# Altium PCB PCB.PcbDoc
Units mm, origin at the board's own origin, x right, y up, seen from the top; angles counter-clockwise.
Board outline 97 x 50 mm, 2 copper layers (Top Layer, Bottom Layer); 43 components, 30 nets, 128 pads, 38 vias.
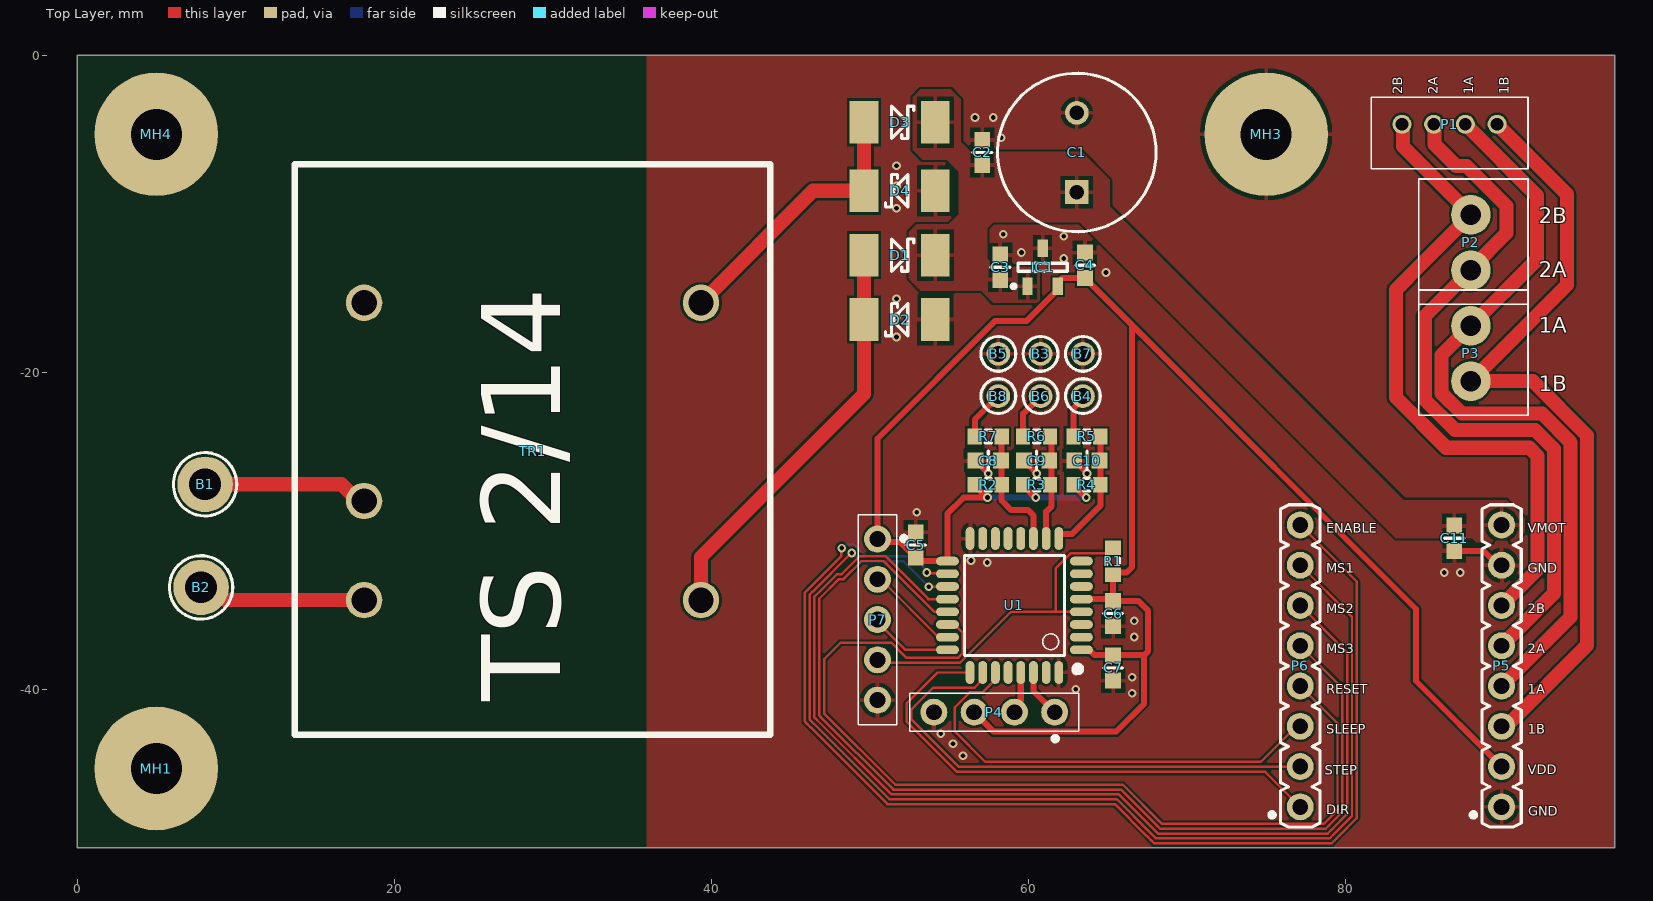
[diagram p0: Top Layer view]
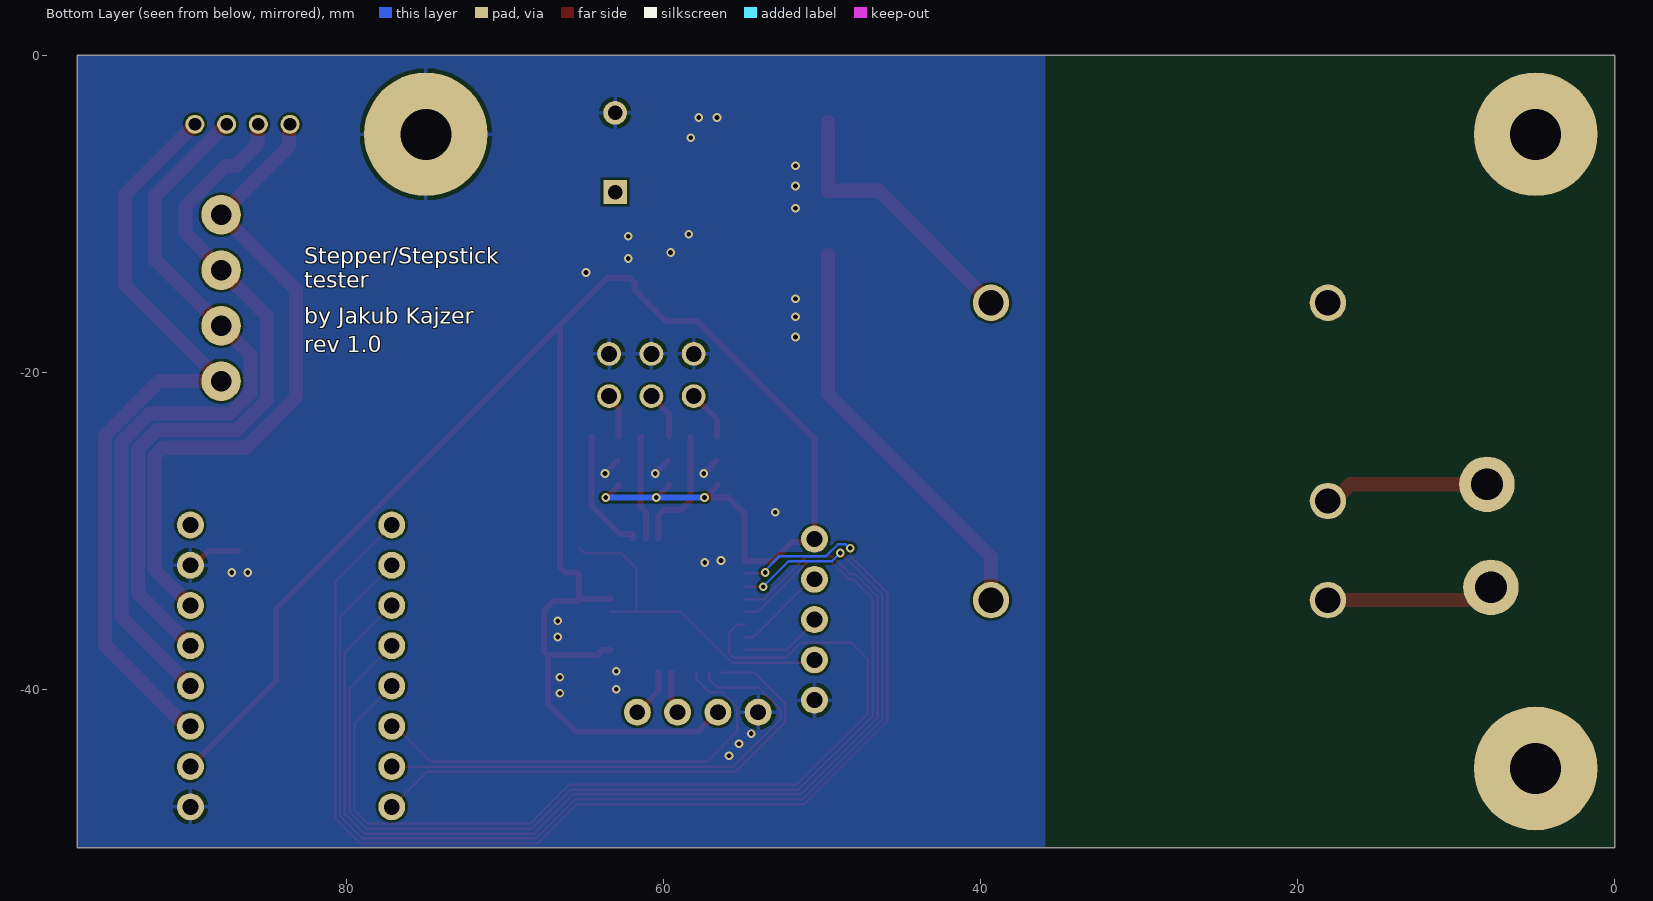
[diagram p1: Bottom Layer view, seen from below]
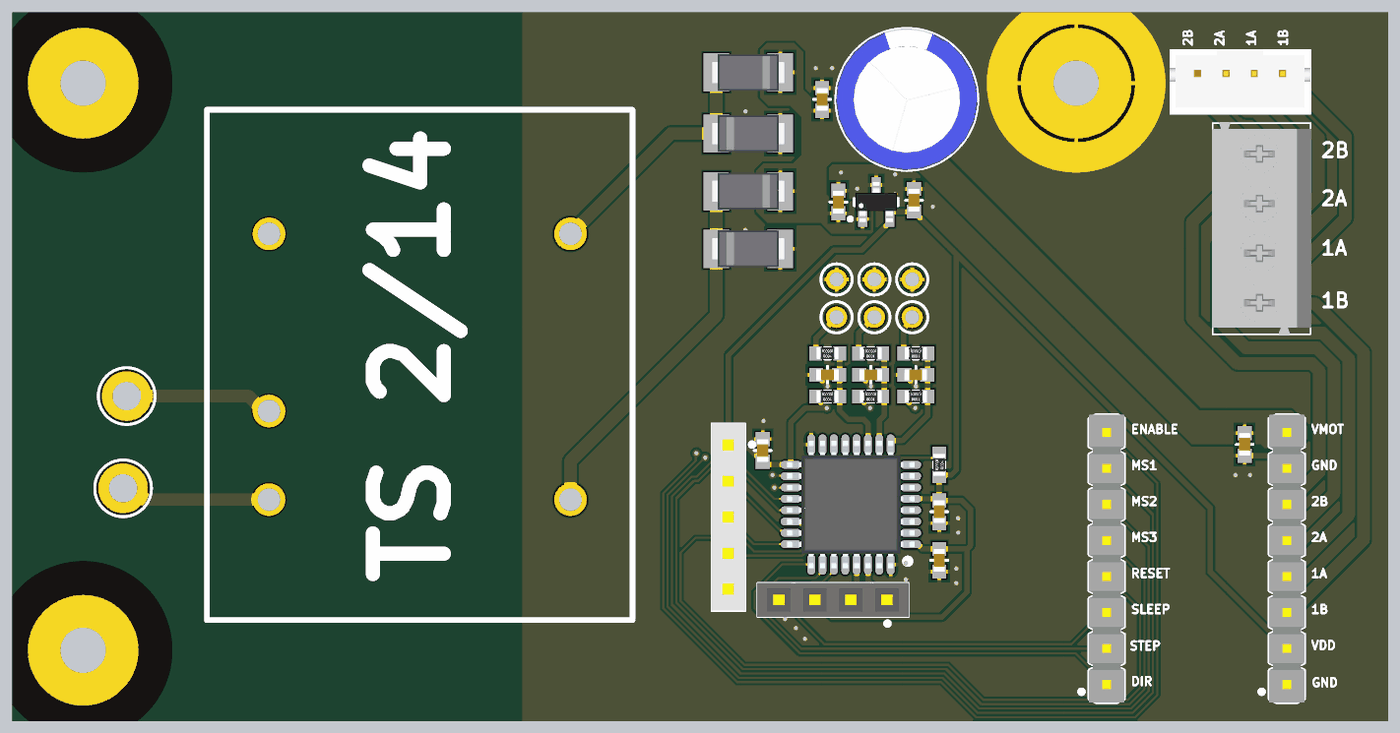
[diagram p2: 3D render of the assembled board from above, using the file's embedded part models]

## Layer stack, top to bottom
Top Solder: solder mask 0.0102, Solder Resist, Dk 3.5
Top Layer: signal copper 0.0356
Dielectric 1: dielectric 0.32, FR-4, Dk 4.8
Bottom Layer: signal copper 0.0356
Bottom Solder: solder mask 0.0102, Solder Resist, Dk 3.5

## Board outline
0,-50 97,-50 97,0 0,0

## Design rules (kind name [scope] priority, off if disabled: settings)
Clearance "Schematic Clearance Constraint_1" [InNet('NetB1_1')] p1: gap=1.25 ignorepadtopadclearanceinfootprint=FALSE
Clearance "Schematic Clearance Constraint" [InNet('NetB2_1')] p2: gap=1.25 ignorepadtopadclearanceinfootprint=FALSE
Clearance [All] p3: gap=0.152 ignorepadtopadclearanceinfootprint=FALSE
Height [All] p1: minheight=0 maxheight=254 prefheight=12.7
PlaneConnect [All] p1: pad.planeconnectstyle=Relief pad.reliefexpansion=0.508 pad.reliefentries=4 pad.reliefconductorwidth=0.254 pad.reliefairgap=0.254 via.planeconnectstyle=Direct via.reliefexpansion=0.508 via.reliefentries=4 via.reliefconductorwidth=0.254 via.reliefairgap=0.254
PolygonConnect [All] p1: thpad.connectstyle=Relief thpad.reliefconductorwidth=0.254 thpad.reliefentries=4 thpad.polygonreliefangle="90 Angle" thpad.airgapwidth=0.254 smdpad.connectstyle=Relief smdpad.reliefconductorwidth=0.254 smdpad.reliefentries=4 smdpad.polygonreliefangle="90 Angle" smdpad.airgapwidth=0.254 via.connectstyle=Direct via.reliefconductorwidth=0.254 via.reliefentries=4 via.polygonreliefangle="90 Angle" via.airgapwidth=0.254
RoutingVias [All] p1: holewidth=0.3 width=0.55 viastyle="Through Hole" minholewidth=0.3 minwidth=0.55 maxholewidth=0.3 maxwidth=0.55
SolderMaskExpansion VIAS [IsVia] p1: expansion=0.102 istentingtop=TRUE
SolderMaskExpansion SolderMaskExpansion_1 [All] p2: expansion=0.102 istentingtop=FALSE
Width [All] p1: maxlimit=1.016 minlimit=0.152 preferedwidth=0.254 minimp=50.000000 maximp=50.000000 favimp=50.000000
28 further rules are at their usual default settings.

## Components (designator, comment, footprint, x,y, rotation, side; value= is the part's Value field where it differs from the comment)
B1 "Pad" PAD_THD_C350H200MM 8.069,-27.07 r0 top
B2 "Pad" PAD_THD_C350H200MM 7.815,-33.574 r0 top
B3 "Pad" PAD_THD_C150H100MM 60.774,-18.842 r0 top
B4 "Pad" PAD_THD_C150H100MM 63.441,-21.509 r0 top
B5 "Pad" PAD_THD_C150H100MM 58.107,-18.842 r0 top
B6 "Pad" PAD_THD_C150H100MM 60.774,-21.509 r0 top
B7 "Pad" PAD_THD_C150H100MM 63.441,-18.842 r0 top
B8 "Pad" PAD_THD_C150H100MM 58.107,-21.509 r0 top
C1 "330uF" CAPPR5-10x16 63.06,-6.142 r90 top
C2 "100nF" CAPC0603X90N 57.091,-6.142 r270 top
C3 "10uF" CAPC0603X90N 58.234,-13.381 r270 top
C4 "10uF" CAPC0603X90N 63.568,-13.254 r270 top
C5 "100nF" CAPC0603X90N 52.9,-30.907 r270 top
C6 "100nF" CAPC0603X90N 65.346,-35.225 r90 top
C7 "100nF" CAPC0603X90N 65.346,-38.654 r90 top
C8 "100nF" CAPC0603X90N 57.472,-25.573 r0 top
C9 "100nF" CAPC0603X90N 60.52,-25.573 r0 top
C10 "100nF" CAPC0603X90N 63.695,-25.573 r0 top
C11 "10uF" CAPC0603X90N 86.868,-30.48 r90 top
D1 "SS110A" "DO-214AC - Schottky" 51.884,-12.619 r180 top
D2 "SS110A" "DO-214AC - Schottky" 51.884,-16.683 r0 top
D3 "SS110A" "DO-214AC - Schottky" 51.884,-4.237 r180 top
D4 "SS110A" "DO-214AC - Schottky" 51.884,-8.555 r0 top
IC1 "AP7333-33SAG-7" SOT23-3 60.901,-13.381 r90 top
MH1 "M3" MH-M3_COPPER_WASHER 5,-45 r0 top locked
MH3 "M3" MH-M3_COPPER_WASHER 75,-5 r0 top locked
MH4 "M3" MH-M3_COPPER_WASHER 5,-5 r0 top locked
P1 "B4B-PH-K-S" B4B-PH-K-S 87.57,-4.364 r180 top
P2 "1776275" SCREWERM_THT_2X1H_3P5MM 87.92,-11.814 r90 top
P3 "1776275" SCREWERM_THT_2X1H_3P5MM 87.92,-18.814 r90 top
P4 "SSW-104-02-L-S" SAMTEC_SSW-104-02-L-S 57.853,-41.448 r180 top
P5 "68000-208HLF" Header_8x1_V_2.54mm_M 89.853,-38.527 r90 top locked
P6 "68000-208HLF" Header_8x1_V_2.54mm_M 77.153,-38.527 r90 top locked
P7 "SSW-105-02-G-S" SAMTEC_SSW-105-02-G-S 50.487,-34.336 r270 top
R1 "10k" RESC0603X60N 65.346,-31.923 r270 top
R2 "10k" RESC0603X60N 57.472,-27.097 r180 top
R3 "10k" RESC0603X60N 60.52,-27.097 r180 top
R4 "10k" RESC0603X60N 63.695,-27.097 r180 top
R5 "10k" RESC0603X60N 63.695,-24.049 r180 top
R6 "10k" RESC0603X60N 60.52,-24.049 r180 top
R7 "10k" RESC0603X60N 57.472,-24.049 r180 top
TR1 "230V/8.2V" "TS 2/14" 28.727,-25 r90 top locked
U1 "STM32L051K8" STM-LQFP32_N 59.123,-34.717 r180 top

## Footprints (in the part's own frame and the unit in brackets; to place one, negate y for a bottom-side part, rotate by r counter-clockwise, add the part's x,y. Pads: shape width x height; smd on the part's side, far side on the other; paste and mask are expansions set on the pad)
B4B-PH-K-S [mm] "2mm header socket, vertical, 4 Positions, THT, 9.9x4.5mm body"
  round 1.2 hole 0.8: 1(-2,0) 2(0,0) 3(2,0) 4(4,0)
  silkscreen extent -3.95,-1.7 5.95,2.8, body extent -3.93,-1.74 5.97,2.76, height 6
CAPC0603X90N [mm] "Chip Capacitor, Body 1.6x0.8mm, IPC Medium Density"
  rect 1x1 smd: 1(-0.8,0) 2(0.8,0)
  silkscreen extent 0,-0.6 0,0.6, body extent -0.8,-0.4 0.8,0.4, height 0.9
CAPPR5-10x16 [mm] "Capacitor, Electrolytic, Radial; Body 10 x 16 mm (Dia.xH typ); Pin Spacing 5 mm (typ)"
  rect 1.5x1.5 hole 0.9: 1(-2.5,0)
  round 1.5 hole 0.9: 2(2.5,0)
  silkscreen extent -5,-5 5,5, body extent -5,-5 5,5, height 16.1
"DO-214AC - Schottky" [mm] "DO, 2-Leads, Body 2.7x4.5mm"
  rect 1.8x2.7 smd: 1(-2.25,0) 2(2.25,0)
  silkscreen extent -0.89,-1.02 0.51,1.02, body extent -2.6,-1.3 2.6,1.3, height 2.4
Header_8x1_V_2.54mm_M [mm] "8 Contacts - Pitch 2.54mm - Single Row Through Mount Straight Header"
  round 1.7 hole 1: 1(-8.89,0) 2(-6.35,0) 3(-3.81,0) 4(-1.27,0) 5(1.27,0) 6(3.81,0) 7(6.35,0) 8(8.89,0)
  silkscreen extent -10.16,-1.24 10.16,1.93, body extent -10.16,-1.24 10.16,1.24, height 8.38
MH-M3_COPPER_WASHER [mm] "M3 screw Mounting Hole with copper with washer"
  round 7.8 hole 3.2 mask+2.4: MH(0,0)
PAD_THD_C150H100MM [mm] "Plated Through Hole: Hole Dia.=1mm Pad Dia.=1.5mm"
  round 1.5 hole 1: 1(0,0)
  silkscreen extent -1.1,-1.1 1.1,1.1
PAD_THD_C350H200MM [mm] "Plated Through Hole: Hole Dia.=2mm Pad Dia.=3.5mm"
  round 3.5 hole 2: 1(0,0)
  silkscreen extent -2,-2 2,2
RESC0603X60N [mm] "Chip Resistor, Body 1.6x0.8mm, IPC Medium Density"
  rect 0.9x1 smd: 1(-0.85,0) 2(0.85,0)
  silkscreen extent -0.2,-0.4 0.2,0.4, body extent -0.77,-0.42 0.78,0.43, height 0.45
SAMTEC_SSW-104-02-L-S [mm] "4 Contacts, Pitch 2.54mm - Top Entry, Single Row, Through Mount Straigh Socket"
  round 1.7 hole 1: 1(-3.81,0) 2(-1.27,0) 3(1.27,0) 4(3.81,0)
  silkscreen extent -5.33,-1.21 5.33,1.81, body extent -5.33,-1.21 5.33,1.21, height 8.51
SAMTEC_SSW-105-02-G-S [mm] "5 Contacts, Pitch 2.54mm - Top Entry, Single Row, Through Mount Straigh Socket"
  round 1.7 hole 1: 1(-3.81,0) 2(-1.27,0) 3(1.27,0) 4(3.81,0) 5(6.35,0)
  silkscreen extent -5.33,-1.21 7.9,1.82, body extent -5.33,-1.21 7.87,1.21, height 8.51
SCREWERM_THT_2X1H_3P5MM [mm] "Terminal Block, Right angle, 2 Positions, THT, Screw Connection, 7x7mm body"
  round 2.5 hole 1.3: 1(-1.75,0) 2(1.75,0)
  silkscreen extent -3.9,-3.6 4,3.3, body extent -3.93,-3.65 4.08,3.35, height 8.3
SOT23-3 [mm] "SOT, 3-Leads, Body 2.9x1.6mm, Pitch 0.95mm, IPC Medium Density"
  rect 1.1x0.65 smd: 1(-1.2,0.95) 2(-1.2,-0.95) 3(1.2,0)
  silkscreen extent -1.32,-1.55 0.25,1.95, body extent -1.4,-1.45 1.4,1.45, height 1.3
STM-LQFP32_N [mm] "CQFP, 32-Leads, Body 9.00x9.00mm, Pitch 0.80mm, IPC Medium Density"
  oval 1.45x0.55 smd: 1(-4.225,2.8) 2(-4.225,2) 3(-4.225,1.2) 4(-4.225,0.4) 5(-4.225,-0.4) 6(-4.225,-1.2) 7(-4.225,-2) 8(-4.225,-2.8) 17(4.225,-2.8) 18(4.225,-2) 19(4.225,-1.2) 20(4.225,-0.4) 21(4.225,0.4) 22(4.225,1.2) 23(4.225,2) 24(4.225,2.8)
  oval 0.55x1.45 smd: 9(-2.8,-4.225) 10(-2,-4.225) 11(-1.2,-4.225) 12(-0.4,-4.225) 13(0.4,-4.225) 14(1.2,-4.225) 15(2,-4.225) 16(2.8,-4.225) 25(2.8,4.225) 26(2,4.225) 27(1.2,4.225) 28(0.4,4.225) 29(-0.4,4.225) 30(-1.2,4.225) 31(-2,4.225) 32(-2.8,4.225)
  silkscreen extent -4.2,-3.15 3.15,4.2, body extent -4.5,-4.5 4.5,4.5, height 1.6
"TS 2/14" [mm] "Transformer, Body 36 x 30mm, Pin Spacing 6.25mm"
  round 2.3 hole 1.6: 1(9.375,10.625) 3(-3.125,10.625) 4(-9.375,10.625) 5(-9.375,-10.625) 8(9.375,-10.625)
  silkscreen extent -17.88,-15 18.13,15, body extent -17.85,-15 18.15,43.03, height 28.5

## Part data
B1 B2: library part PAD_THD_C350H200MM, "Plated Through Hole: Hole Dia.=2mm Pad Dia.=3.5mm", Author=KB, Create Date=11.05.2019, DesignItemId=PAD_THD_C350H200MM, Family=Pad, LatestRevisionDate=11.05.2019, Part Description="Plated Through Hole: Hole Dia.=2mm Pad Dia.=3.5mm"
B3 B4 B5 B6 B7 B8: library part PAD_THD_C150H100MM, "Plated Through Hole: Hole Dia.=1mm Pad Dia.=1.5mm", Author=KB, Create Date=11.05.2019, DesignItemId=PAD_THD_C150H100MM, Family=Pad, LatestRevisionDate=11.05.2019, Part Description="Plated Through Hole: Hole Dia.=1mm Pad Dia.=1.5mm"
C1: library part CE_THT_5-10X16_330UF_50V_20%, "Polarised capacitor", Case="Radial 5mm-10x16mm", Manufacturer=GENERIC, Manufacturer 1 Component Height=16mm, Manufacturer 1 Example="Illinois Capacitor / CDE", Manufacturer 1 Part Number=337CKS050M, Supplier Part Number 1=598-337CKS050M, Tolerance=20%, Voltage=50V, Author=UN, Create Date=16.10.2019, DesignItemId=CE_THT_5-10X16_330UF_50V_20%, HelpURL=https://pl.mouser.com/datasheet/2/88/CKR_CKS_series-553026.pdf, LatestRevisionDate=16.10.2019, Manufacturer Part Number=CE_THT_5-10X16_330UF_50V_20%, Mounted=Yes, Part Description="Polarised capacitor", Pin Count=2, PressFit=No, Sense=No, SMD=No, Socket=No, Status=Recommended, Supplier 1=Mouser, Supplier 2=Digi-Key, Supplier Part Number 2=1572-1438-ND
C2 C5 C6 C7 C8 C9 C10: library part CC0603_100NF_16V_10%_X7R, "Non-polarised capacitor", Case="0603 (1608 metric)", Dielectric=X7R, Manufacturer=GENERIC, Manufacturer 1 Component Height=0.8mm, Manufacturer 1 Example=Vishay, Manufacturer 1 Part Number=VJ0603Y104KXJCW1BC, Supplier Part Number 1=2896425, Tolerance=10%, Voltage=16V, Author=KB, Create Date=01.04.2019, DesignItemId=CC0603_100NF_16V_10%_X7R, HelpURL=https://www.vishay.com/docs/28548/vjw1bcbascomseries.pdf, LatestRevisionDate=01.04.2019, Manufacturer Part Number=CC0603_100NF_16V_10%_X7R, Mounted=Yes, Part Description="Non-polarised capacitor", Pin Count=2, PressFit=No, Sense=No, SMD=Yes, Socket=No, Status=Recommended, Supplier 1=Farnell, Supplier 2=TME, Supplier 3=Mouser, Supplier Part Number 2=VJ0603Y104KXJCW1BC, Supplier Part Number 3=710-885012206046
C3 C4 C11: library part CC0603_10UF_16V_20%_X5R, "Non-polarised capacitor", Case="0603 (1608 metric)", Dielectric=X5R, Manufacturer=GENERIC, Manufacturer 1 Component Height=0.8mm, Manufacturer 1 Example=Samsung, Manufacturer 1 Part Number=CL10A106MO8NQNC, Supplier Part Number 1=2611923, Tolerance=20%, Voltage=16V, Author=KB, Create Date=01.04.2019, DesignItemId=CC0603_10UF_16V_20%_X5R, HelpURL=https://www.vishay.com/docs/28548/vjw1bcbascomseries.pdf, LatestRevisionDate=01.04.2019, Manufacturer Part Number=CC0603_10UF_16V_20%_X5R, Mounted=Yes, Part Description="Non-polarised capacitor", Pin Count=2, PressFit=No, Sense=No, SMD=Yes, Socket=No, Status=Recommended, Supplier 1=Farnell, Supplier 2=TME, Supplier 3=Mouser, Supplier Part Number 2=CL10A106MO8NQNC, Supplier Part Number 3=81-GRM188R61C106KALD
D1 D2 D3 D4: "Surface Mount Schottky Rectifier", Manufacturer 1 Component Height=2.1mm, Manufacturer 1 Example="YANGJIE TECHNOLOGY", Supplier Part Number 1=SS110A-YAN, Author=JK, Create Date=24.04.2020, DesignItemId=SS110A, Device=SS110A, HelpURL=https://www.tme.eu/Document/f86dbf25808a64c8f6899aa01bdfadcb/SS12A_SER.pdf, LatestRevisionDate=24.04.2020, Manufacturer 1 Part Number=SS110A, Mounted=Yes, Part Description="Surface Mount Schottky Rectifier", Pin Count=2, PressFit=No, Sense=No, SMD=Yes, Socket=No, Supplier 1=TME
IC1: "3.3V, 0.3A output; Vin 6V max, 0.3V dropout", Manufacturer 1 Component Height=1.45mm, Manufacturer 1 Example="DIODES INCORPORATED", Author=BS, Create Date=08.10.2019, DesignItemId=AP7333-33SAG-7, Device=AP7333-33SAG-7, HelpURL=https://www.tme.eu/Document/7cdd3961abdbf22d69f4b7af2917b5be/AP7333.pdf, LatestRevisionDate=08.10.2019, Manufacturer 1 Part Number=AP7333-33SAG-7, Mounted=Yes, Part Description="3.3V, 0.3A output; Vin 6V max, 0.3V dropout", Pin Count=3, PressFit=No, Sense=No, SMD=Yes, Socket=No, Supplier 1=TME, Supplier 2=Mouser, Supplier Part Number 1=AP7333-33SAG-7
MH1 MH3 MH4: library part MH-M3_CW, "Mounting hole, M3, exposed pad, space for washer", Author=KB, Create Date=11.05.2019, DesignItemId=MH-M3_CW, Family=M3, LatestRevisionDate=11.05.2019, Part Description="Mounting hole, M3, exposed pad, space for washer"
P1: library part PH-K-S_4X1V_2P0MM, "2mm header socket, vertical, 4 Positions, THT, 9.9x4.5mm body", Current Max=2A, Manufacturer=GENERIC, Manufacturer 1 Component Height=6mm, Manufacturer 1 Example=JST, Voltage Max=100V, Author=KB, Create Date=19.03.2012, DesignItemId=PH-K-S_4X1V_2P0MM, Family=PH-K-S, HelpURL=https://www.tme.eu/Document/bde47a97a79ef7b2143e7f603cd40725/PH.pdf, LatestRevisionDate=19.03.2012, Manufacturer 1 Part Number=B4B-PH-K-S, Manufacturer Part Number=B4B-PH-K-S, Mounted=Yes, Part Description="2mm header socket, vertical, 4 Positions, THT, 9.9x4.5mm body", Pin Count=4, PressFit=No, Sense=No, SMD=No, Socket=No, Status=Recommended, Supplier 1=TME, Supplier 2=Farnell, Supplier Part Number 1=B4B-PH-K-S, Supplier Part Number 2=9492437
P2 P3: library part SCREWERM_THT_2X1H_3P5MM, "Terminal Block, Right angle, 2 Positions, THT, Screw Connection, 7x7mm body", Current Max=7A, Manufacturer=GENERIC, Manufacturer 1 Component Height=8.3mm, Manufacturer 1 Example="TE Connectivity", Manufacturer 1 Part Number=1776275-2, Voltage Max=250V, Author=JK, Create Date=11.01.2020, DesignItemId=SCREWERM_THT_2X1H_3P5MM, Family=1776275, HelpURL=https://www.tme.eu/Document/7b0ef2ac8bc0c4f2c9b8dae3b21b7e62/1776275-2.pdf, LatestRevisionDate=11.01.2020, Manufacturer Part Number=SCREWERM_THT_2X1H_3P5MM, Mounted=Yes, Part Description="Terminal Block, Right angle, 2 Positions, THT, Screw Connection, 7x7mm body", Pin Count=2, PressFit=No, Sense=No, SMD=No, Socket=No, Status=Recommended, Supplier 1=TME, Supplier Part Number 1=1776275-2
P4: library part HDR_THT_4X1V_F_2P54MM, "General Purpose Header: THT, 2.54mm, Female, Straight", Current Max=4.7A, Manufacturer=GENERIC, Manufacturer 1 Component Height=9.78mm, Manufacturer 1 Example=Samtec, Supplier Part Number 1=200-SSW10402LSRA, Author=PC, Create Date=19.08.2012, DesignItemId=HDR_THT_4X1V_F_2P54MM, Family=SSW, HelpURL=https://pl.mouser.com/datasheet/2/527/ssw_th-1507658.pdf, LatestRevisionDate=19.08.2012, Manufacturer 1 Part Number=SSW-104-02-L-S, Manufacturer Part Number=HDR_THT_4X1V_F_2P54MM, Mounted=Yes, Part Description="General Purpose Header: THT, 2.54mm, Female, Straight", Pin Count=4, PressFit=No, Sense=No, SMD=No, Socket=No, Status=Recommended, Supplier 1=Mouser, Supplier 2=Digi-Key
P5 P6: library part HDR_THT_8X1V_M_2P54MM, "General Purpose Header: THT, 2.54mm, Male, Straight", Manufacturer=GENERIC, Manufacturer 1 Component Height=6.7mm, Manufacturer 1 Example=AMPHENOL, Manufacturer Part Number=Header_8x1_V_2.54mm_M, Author=JK, Create Date=17.12.2019, DesignItemId=HDR_THT_8X1V_M_2P54MM, Family=HTSW, HelpURL=https://www.tme.eu/Document/deb83b8ba474aa6382ee38bb24abad5e/68000-XXXXLF.pdf, LatestRevisionDate=17.12.2019, Manufacturer 1 Part Number=68000-208HLF, Mounted=Yes, Part Description="General Purpose Header: THT, 2.54mm, Male, Straight", Pin Count=8, PressFit=No, Sense=No, SMD=No, Socket=No, Status=Recommended, Supplier 1=TME, Supplier Part Number 1=68000-208HLF
P7: library part HDR_THT_5X1V_F_2P54MM, "General Purpose Header: THT, 2.54mm, Female, Straight, Long Lead", Current Max=3A, Manufacturer=GENERIC, Manufacturer 1 Component Height=11.55mm, Manufacturer 1 Example=Samtec, Supplier Part Number 1=ZL262-5SG, Author=UN, Create Date=19.08.2014, DesignItemId=HDR_THT_5X1V_F_2P54MM, Family=SSW, HelpURL=https://pl.mouser.com/datasheet/2/527/ssw_th-1507658.pdf, LatestRevisionDate=19.08.2014, Manufacturer 1 Part Number=SSW-105-02-G-S, Manufacturer Part Number=HDR_THT_5X1V_F_2P54MM, Mounted=Yes, Part Description="General Purpose Header: THT, 2.54mm, Female, Straight, Long Lead", Pin Count=5, PressFit=No, Sense=No, SMD=No, Socket=No, Status=Recommended, Supplier 1=TME, Supplier 2=Mouser
R1 R2 R3 R4 R5 R6 R7: library part R0603_10K0_0.1W_100PPM, "General Purpose Thick Film Chip Resistor", Case="0603 (1608 metric)", Current Max=0, Manufacturer=GENERIC, Manufacturer 1 Component Height=0.5mm, Manufacturer 1 Example=Vishay, Manufacturer 1 Part Number=CRCW060310K0FKEDC, Manufacturer Part Number="R0603_10K0_0.0625W 0.1W 0.125W 0.25W 0.5W 1W 0.75W 1W_100PPM", Power=100mW, Tolerance=1%, Voltage=75V, Author=KB, Component Type=Standard, Create Date=03.07.2019, DesignItemId=R0603_10K0_0.1W_100PPM, HelpURL=https://www.vishay.com/docs/20035/dcrcwe3.pdf, LatestRevisionDate=03.07.2019, Mounted=Yes, Part Description="General Purpose Thick Film Chip Resistor", Pin Count=2, PressFit=No, Sense=No, SMD=Yes, Socket=No, Status=Recommended, Supplier 1=Farnell, Supplier 2=TME, Supplier 3=Mouser, TC="?100 ppm/?C"
TR1: library part "TS 2/14", "Transformer", Manufacturer=INDEL, Manufacturer 1 Component Height=28.5mm, Max Power=2VA, Supplier Part Number 1=TS2/14, Author=JK, Case="TS 2/14", Create Date=12.06.2020, DesignItemId="TS 2/14", HelpURL=https://www.tme.eu/Document/ef0b0bfa1a568056a0745f8e867b1088/36_1.pdf, LatestRevisionDate=12.06.2020, Manufacturer 1 Example=INDEL, Manufacturer 1 Part Number="TS 2/14", Manufacturer Part Number="TS 2/14", Mounted=Yes, Part Description=Transformer, Pin Count=5, PressFit=No, Sense=No, SMD=No, Socket=No, Status=Recommended, Supplier 1=TME
U1: "Ultra-low-power ARM Cortex-M0+ MCU with 64 Kbytes Flash, 32 MHz CPU", Manufacturer 1 Component Height=1.6mm, Manufacturer 1 Example=STMicroelectronics, Manufacturer 1 Part Number=STM32L051K8T6, Supplier Part Number 1=511-STM32L051K8T6, Author=JK, Create Date=02.01.2020, DesignItemId=STM32L051K8, Device=STM32L051K8, HelpURL=https://www.st.com/resource/en/datasheet/stm32l051k8.pdf, LatestRevisionDate=02.01.2020, Mounted=Yes, Part Description="Ultra-low-power ARM Cortex-M0+ MCU with 64 Kbytes Flash, 32 MHz CPU", Pin Count=32, PressFit=No, Sense=No, SMD=Yes, Socket=No, Supplier 1=Mouser

## Via types
v1: diameter 0.55, hole 0.3, Top Layer to Bottom Layer, tented both sides, 38 vias

## Nets (pads, with @x,y where several pads share a name; then routed paths per layer and width w, separated by ;. In a path a pad name is that pad's centre, name@x,y a point inside that pad or via, vN(x,y) a via of type N, cw(c..) or ccw(c..) an arc to the next point about the centre after c; other vN are vias at no path point)
1A: P1.2 P3.2 P5.4 | length 47.9
  Top Layer w0.889: P1.2 92.075,-8.869 92.075,-12.909 P3.2 86.073,-18.911 86.073,-21.329 87.36,-22.616 92.401,-22.616 94.209,-24.423 94.209,-35.441 P5.4
1B: P1.1 P3.1 P5.3 | length 50
  Top Layer w0.889: P1.1 93.98,-8.774 93.98,-14.504 P3.1 91.822,-20.564 95.25,-23.992 95.25,-37.223 90.291,-42.182 90.008,-42.182 P5.3
2A: P1.3 P2.1 P5.5 | length 45
  Top Layer w0.889: P1.3 85.63,-4.424 85.63,-5.62 86.995,-6.985 87.63,-6.985 90.17,-9.525 90.17,-11.227 87.92,-13.477 P2.1 85.032,-16.452 85.032,-21.76 86.928,-23.657 91.97,-23.657 93.167,-24.854 93.167,-33.943 P5.5
2B: P1.4 P2.2 P5.6 | length 41.8
  Top Layer w0.889: P1.4 83.63,-4.424 83.63,-5.774 P2.2 84.798,-13.186 83.185,-14.799 83.185,-21.59 86.36,-24.765 91.605,-24.765 92.126,-25.286 92.126,-32.444 P5.6
BTN1: C10.2 R4.1 R5.1 U1.9 | length 8
  Top Layer w0.381: U1.9 61.923,-30.272 62.001,-30.194 62.77,-30.194 64.545,-28.419 R4.1 R5.1
BTN2: C9.2 R3.1 R6.1 U1.10 | length 6.6
  Top Layer w0.381: U1.10 61.123,-28.793 61.468,-28.448 61.468,-24.147 R6.1
BTN3: C8.2 R2.1 R7.1 U1.11 | length 7.9
  Top Layer w0.381: R7.1 58.322,-25.573 R2.1 58.322,-28.096 58.928,-28.702 59.993,-28.702 60.323,-29.032 U1.11
DIR: P6.1 U1.25 | length 33
  Top Layer w0.152: U1.25 54.276,-38.942 52.324,-40.894 52.324,-42.037 55.499,-45.212 74.948,-45.212 P6.1
ENABLE: P6.8 U1.18 | length 78.1
  Top Layer w0.152: v1(48.226,-31.098) 48.226,-31.149 48.191,-31.184 48.191,-31.619 46.255,-33.555 46.166,-33.644 46.076,-33.733 45.987,-33.823 45.898,-33.912 45.898,-42.034 45.987,-42.123 46.076,-42.213 46.166,-42.302 46.255,-42.391 51.108,-47.244 65.459,-47.244 67.464,-49.249 67.553,-49.338 67.642,-49.428 67.732,-49.517 67.93,-49.715 79.136,-49.715 79.334,-49.517 79.424,-49.428 79.513,-49.338 79.602,-49.249 80.721,-48.13 80.721,-33.205 P6.8 ; v1(53.594,-32.639) 53.633,-32.678 54.859,-32.678 U1.18
  Bottom Layer w0.152: v1(48.226,-31.098) 48.277,-31.098 48.514,-30.861 49.022,-30.861 49.766,-31.605 52.687,-31.605 53.594,-32.512 v1(53.594,-32.639)
GND: B3.1 B5.1 B7.1 C1.2 C2.1 C3.1 C4.1 C5.1 C6.1 C7.1 C8.1 C9.1 C10.1 C11.1 D2.2 D4.2 IC1.3 MH3.MH P4.4 P5.1 P5.7 P7.5 U1.16 U1.32 | length 6.8
  Top Layer w0.381: C8.1 57.478,-26.379 v1(57.478,-26.386) ; C9.1 60.526,-26.379 v1(60.526,-26.386) ; C10.1 63.701,-26.379 v1(63.701,-26.386) ; C11.1 88.74,-31.28 89.637,-32.177 P5.7
  other v1: 55.88,-44.196 55.245,-43.434 54.483,-42.799 66.548,-40.259 62.992,-40.005 66.548,-39.243 62.992,-38.862 66.675,-36.703 66.675,-35.687 86.233,-32.639 87.249,-32.639 57.404,-32.004 56.388,-31.877 52.959,-28.829 51.689,-17.78 51.689,-16.51 51.689,-15.367 64.897,-13.716 62.23,-12.827 59.563,-12.446 62.23,-11.43 58.42,-11.303 51.689,-9.652 51.689,-8.255 51.689,-6.985 58.293,-5.207 56.642,-3.937 57.785,-3.937
MS1: P6.7 U1.19 | length 73.6
  Top Layer w0.152: v1(48.856,-31.408) 48.833,-31.408 46.381,-33.86 46.292,-33.949 46.203,-34.038 46.203,-41.908 46.292,-41.997 46.381,-42.086 46.47,-42.176 51.234,-46.939 65.585,-46.939 67.679,-49.034 67.769,-49.123 67.858,-49.212 68.056,-49.41 79.01,-49.41 79.208,-49.212 79.297,-49.123 79.387,-49.034 80.416,-48.004 80.416,-35.44 P6.7 ; v1(53.721,-33.528) 53.727,-33.522 54.893,-33.522 U1.19
  Bottom Layer w0.152: v1(48.856,-31.408) 49.377,-31.928 52.121,-31.928 v1(53.721,-33.528)
MS2: P6.6 U1.20 | length 69.7
  Top Layer w0.152: U1.20 53.695,-34.317 50.982,-31.605 49.372,-31.605 48.226,-32.751 47.921,-32.751 46.597,-34.075 46.507,-34.164 46.507,-41.782 46.597,-41.871 46.686,-41.96 51.36,-46.634 65.711,-46.634 67.895,-48.818 67.984,-48.907 68.182,-49.105 78.884,-49.105 79.082,-48.907 79.171,-48.818 80.112,-47.878 80.112,-37.676 P6.6
MS3: P6.5 U1.21 | length 65.7
  Top Layer w0.152: U1.21 54.887,-35.106 54.052,-35.106 52.439,-33.493 50.856,-31.909 49.498,-31.909 48.352,-33.055 48.048,-33.055 46.812,-34.291 46.812,-41.655 46.901,-41.745 51.487,-46.33 65.838,-46.33 68.11,-48.603 68.308,-48.8 78.758,-48.8 78.956,-48.603 79.807,-47.751 79.807,-39.911 P6.5
NetB1_1: B1.1 TR1.3 | length 10.5
  Top Layer w0.889: B1.1 16.666,-27.07 17.721,-28.125 TR1.3
NetB2_1: B2.1 TR1.4 | length 10.6
  Top Layer w0.889: B2.1 8.522,-33.574 9.323,-34.375 TR1.4
NetB4_1: B4.1 R5.2 | length 2.8
  Top Layer w0.381: R5.2 62.845,-22.292 63.441,-21.696 B4.1
NetB6_1: B6.1 R6.2 | length 3
  Top Layer w0.381: R6.2 59.67,-22.613 B6.1
NetB8_1: B8.1 R7.2 | length 3.2
  Top Layer w0.381: R7.2 56.639,-24.032 56.639,-22.977 B8.1
NetD1_2: D1.2 D2.1 TR1.5 | length 26
  Top Layer w0.889: TR1.5 39.352,-31.648 49.634,-21.366 D2.1 D1.2
NetD3_2: D3.2 D4.1 TR1.8 | length 17.5
  Top Layer w0.889: TR1.8 46.422,-8.555 D4.1 D3.2
NRST: P7.4 R1.1 U1.4 | length 21.2
  Top Layer w0.152: P7.4 50.667,-38.325 55.683,-38.325 58.892,-35.117 61.722,-35.117 ; U1.4 61.722,-35.117 ; R1.1 65.006,-31.413 62.69,-31.413 61.722,-32.381 61.722,-35.117
P3V3: C4.2 C5.2 C6.2 C7.2 IC1.2 P4.3 P5.2 P7.1 R1.2 R2.2 R3.2 R4.2 U1.1 U1.5 U1.17 | length 131
  Top Layer w0.381: P4.3 57.807,-42.672 65.532,-42.672 67.302,-40.902 67.302,-37.854 ; R2.2 56.622,-27.147 57.386,-27.91 v1(57.428,-27.91) 55.91,-27.91 54.898,-28.922 U1.17 53.11,-31.917 51.909,-30.716 50.677,-30.716 P7.1 50.487,-24.189 57.912,-16.764 59.893,-16.764 61.851,-14.806 IC1.2 61.851,-14.356 62.153,-14.054 C4.2 66.548,-17.034 66.548,-32.289 66.195,-32.642 65.477,-32.642 R1.2 C6.2 ; R3.2 59.67,-27.147 60.434,-27.91 v1(60.476,-27.91) ; R4.2 62.845,-27.147 63.609,-27.91 v1(63.651,-27.91) ; U1.1 63.844,-37.517 64.181,-37.854 C7.2 67.302,-37.854 ; U1.5 65.238,-34.317 C6.2 ; 66.651,-17.136 84.455,-34.941 84.455,-39.479 P5.2 ; C6.2 66.937,-34.425 67.564,-35.052 67.564,-37.592 67.302,-37.854
  Bottom Layer w0.381: v1(57.428,-27.91) v1(60.476,-27.91) v1(63.651,-27.91)
RESET: P6.4 U1.22 | length 60
  Top Layer w0.152: U1.22 55.348,-35.917 55.852,-36.421 55.852,-37.726 55.557,-38.021 52.322,-38.021 51.368,-37.067 48.159,-37.067 47.117,-38.11 47.117,-41.529 51.613,-46.025 65.964,-46.025 68.435,-48.496 78.631,-48.496 79.502,-47.625 79.502,-42.146 P6.4
SCL: P4.2 U1.29 | length 2.7
  Top Layer w0.381: P4.2 59.123,-41.091 59.523,-40.691 U1.29
SDA: P4.1 U1.30 | length 3.1
  Top Layer w0.381: U1.30 60.323,-40.108 P4.1
SLEEP: P6.3 U1.27 | length 28.8
  Top Layer w0.152: U1.27 57.923,-39.392 57.115,-40.2 56.306,-40.2 55.372,-41.134 55.372,-42.672 57.277,-44.577 74.676,-44.577 76.916,-42.337 P6.3
STEP: P6.2 U1.26 | length 32.1
  Top Layer w0.152: U1.26 57.123,-39.392 56.62,-39.896 54.007,-39.896 52.832,-41.071 52.629,-41.274 52.629,-41.911 55.6,-44.882 77.148,-44.882 P6.2
SWCLK: P7.3 U1.24 | length 5.3
  Top Layer w0.152: P7.3 50.487,-35.755 52.249,-37.517 U1.24
SWDIO: P7.2 U1.23 | length 5.9
  Top Layer w0.152: P7.2 50.69,-33.066 54.341,-36.717 U1.23
VCC: C1.1 C2.2 C3.2 C11.2 D1.1 D3.1 IC1.1 P5.8
pads on no net: MH1.MH MH4.MH TR1.1 U1.2 U1.3 U1.6 U1.7 U1.8 U1.12 U1.13 U1.14 U1.15 U1.28 U1.31

## Polygon pours and split planes (outlines as drawn)
VCC on Top Layer "NONET_L-01_P-001" (solid, pour order 0): 65.151,-9.525 83.693,-28.067 90.17,-28.067 91.313,-29.21 91.313,-30.099 90.678,-30.734 88.265,-30.734 88.011,-30.48 83.185,-30.48 63.246,-10.541 57.785,-10.541 57.404,-10.922 57.404,-12.827 57.912,-13.335 60.325,-13.335 60.706,-13.716 60.706,-15.621 57.785,-15.621 57.023,-14.859 53.213,-14.859 52.451,-14.097 52.451,-11.176 52.959,-10.668 54.991,-10.668 55.626,-10.033 55.626,-7.366 54.864,-6.604 53.34,-6.604 52.705,-5.969 52.705,-2.667 53.213,-2.159 55.118,-2.159 55.753,-2.794 55.753,-5.461 56.388,-6.096 63.373,-6.096 65.151,-7.874
GND on Top Layer "GND_L01_P001" (solid, pour order 1): 35.941,-50 97,-50 97,0 35.941,0
GND on Bottom Layer "GND_L02_P002" (solid, pour order 2): 35.941,-50 97,-50 97,0 35.941,0

## Silkscreen, mask and mechanical layers (free items; w line width, h text height)
Top Overlay:
  text "2B" at 83.583,-2.453 h0.6 r90
  text "2A" at 85.823,-2.453 h0.6 r90
  text "1A" at 88.063,-2.453 h0.6 r90
  text "1B" at 90.303,-2.453 h0.6 r90
  text "2B" at 92.2,-10.6 h1
  text "2A" at 92.2,-14 h1
  text "1A" at 92.2,-17.5 h1
  text "1B" at 92.2,-21.2 h1
  text "ENABLE" at 78.8,-30.12 h0.6
  text "VMOT" at 91.5,-30.12 h0.6
  text "MS1" at 78.8,-32.66 h0.6
  text "GND" at 91.5,-32.66 h0.6
  text "MS2" at 78.8,-35.2 h0.6
  text "2B" at 91.5,-35.2 h0.6
  text "MS3" at 78.8,-37.74 h0.6
  text "2A" at 91.5,-37.74 h0.6
  text "RESET" at 78.8,-40.28 h0.6
  text "1A" at 91.5,-40.28 h0.6
  text "SLEEP" at 78.8,-42.82 h0.6
  text "1B" at 91.5,-42.82 h0.6
  text "VDD" at 91.5,-45.36 h0.6
  text "STEP" at 78.7,-45.4 h0.6
  text "DIR" at 78.8,-47.9 h0.6
  text "GND" at 91.529,-47.985 h0.6
Bottom Overlay:
  text "Stepper/Stepstick / tester" at 82.664,-14.67 h1.02
  text "by Jakub Kajzer" at 82.664,-16.956 h1.02
  text "rev 1.0" at 82.664,-18.734 h1.02
PCB Outline:
  the board outline again, w0.2
PCB Dimensions:
  circle w0.254: c75,-5 r1.605
  circle w0.254: c5,-45 r1.605
  circle w0.254: c5,-5 r1.605
  lines w0.2: 3.398,-5 6.602,-5 ; 3.4,-45 6.605,-45 ; 4.998,-6.6 4.998,-3.4 ; 5,-46.6 5,-43.4 ; 73.398,-5 76.602,-5 ; 74.998,-6.6 74.998,-3.4
  lines w0.254: 0,-50 0,0 97,0 97,-50 0,-50

## Dimensions
0,-50 to 3.395,-45 on PCB Dimensions
0,-50 to 5,-46.6 on PCB Dimensions

## Text inside footprints (layer, text, board x,y; h text height)
TR1: Top Overlay "TS 2/14" at 30.477,-40.75 h5 r90